# Altium PCB PowerBoard.PcbDoc (part 2 of 2)
Units mm, origin at the board's own origin, x right, y up, seen from the top; angles counter-clockwise.
Board outline 106.25 x 146.25 mm, 4 copper layers (Top Layer, Signal Layer 1, Signal Layer 2, Bottom Layer), stack 2.22 mm thick; 73 components, 20 nets, 353 pads, 2185 vias.
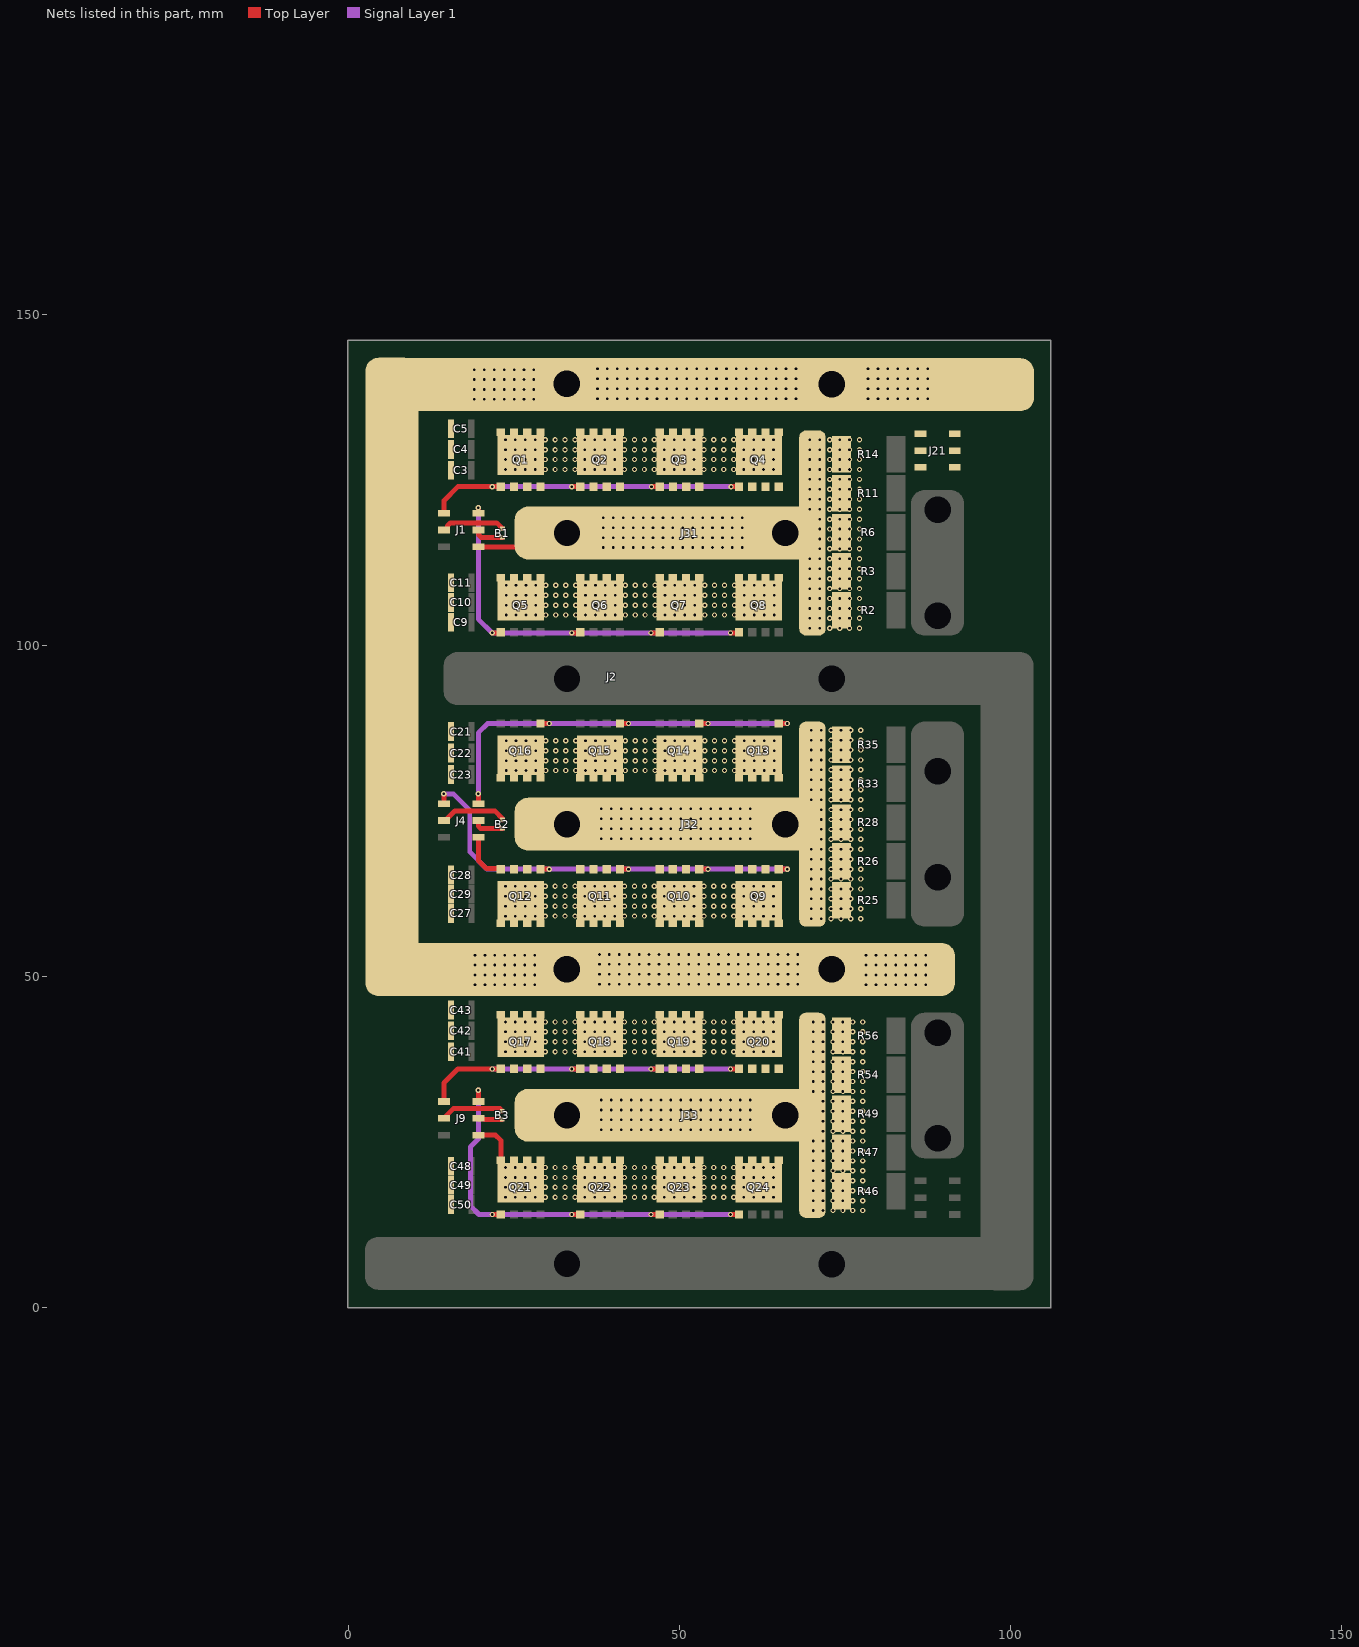
[diagram p4: the nets of this part, all layers, seen from the top]

## Via types
v1: diameter 0.8, hole 0.4, Top Layer to Bottom Layer, tented both sides, 2185 vias

## Nets (pads, with @x,y where several pads share a name; then routed paths per layer and width w, separated by ;. In a path a pad name is that pad's centre, name@x,y a point inside that pad or via, vN(x,y) a via of type N, cw(c..) or ccw(c..) an arc to the next point about the centre after c; other vN are vias at no path point) (continued)
PHASE_U: J1.6 J31.1 Q1.SOURCE Q2.SOURCE Q3.SOURCE Q4.SOURCE Q5.DRAIN Q6.DRAIN Q7.DRAIN Q8.DRAIN R2.2 R3.2 R6.2 R11.2 R14.2 | length 31.5
  Top Layer w0.75: J1.6@19.6,114.92 29.936,114.92 30.793,115.777 32.143,115.777 33,114.92 34.075,115.995 35.425,115.995 36.501,114.92 46,114.92 47.18,116.1 47.7,116.1 J31.1@48.6,117
  other v1: 69.7,102.6 71.2,102.6 72.7,102.6 74.2,102.6 75.7,102.6 77.2,102.6 69.7,104.1 71.2,104.1 72.7,104.1 74.2,104.1 75.7,104.1 77.2,104.1 23.8,104.6 25.3,104.6 26.8,104.6 28.3,104.6 29.8,104.6 31.3,104.6 32.8,104.6 34.3,104.6 35.8,104.6 37.3,104.6 38.8,104.6 40.3,104.6 41.8,104.6 43.3,104.6 44.8,104.6 46.3,104.6 47.8,104.6 49.3,104.6 50.8,104.6 52.3,104.6 53.8,104.6 55.3,104.6 56.8,104.6 58.3,104.6 59.8,104.6 61.3,104.6 62.8,104.6 64.3,104.6 69.7,105.6 71.2,105.6 72.7,105.6 74.2,105.6 75.7,105.6 77.2,105.6 23.8,106.1 25.3,106.1 26.8,106.1 28.3,106.1 29.8,106.1 31.3,106.1 32.8,106.1 34.3,106.1 35.8,106.1 37.3,106.1 38.8,106.1 40.3,106.1 41.8,106.1 43.3,106.1 44.8,106.1 46.3,106.1 47.8,106.1 49.3,106.1 50.8,106.1 52.3,106.1 53.8,106.1 55.3,106.1 56.8,106.1 58.3,106.1 59.8,106.1 61.3,106.1 62.8,106.1 64.3,106.1 69.7,107.1 71.2,107.1 72.7,107.1 74.2,107.1 75.7,107.1 77.2,107.1 23.8,107.6 25.3,107.6 26.8,107.6 28.3,107.6 29.8,107.6 31.3,107.6 32.8,107.6 34.3,107.6 35.8,107.6 37.3,107.6 38.8,107.6 40.3,107.6 41.8,107.6 43.3,107.6 44.8,107.6 46.3,107.6 47.8,107.6 49.3,107.6 50.8,107.6 52.3,107.6 53.8,107.6 55.3,107.6 56.8,107.6 58.3,107.6 59.8,107.6 61.3,107.6 62.8,107.6 64.3,107.6 69.7,108.6 71.2,108.6 72.7,108.6 74.2,108.6 75.7,108.6 77.2,108.6 23.8,109.1 25.3,109.1 26.8,109.1 28.3,109.1 29.8,109.1 31.3,109.1 32.8,109.1 34.3,109.1 35.8,109.1 37.3,109.1 38.8,109.1 40.3,109.1 41.8,109.1 43.3,109.1 44.8,109.1 46.3,109.1 47.8,109.1 49.3,109.1 50.8,109.1 52.3,109.1 53.8,109.1 55.3,109.1 56.8,109.1 58.3,109.1 59.8,109.1 61.3,109.1 62.8,109.1 64.3,109.1 69.7,110.1 71.2,110.1 72.7,110.1 74.2,110.1 75.7,110.1 77.2,110.1 69.7,111.6 71.2,111.6 72.7,111.6 74.2,111.6 75.7,111.6 77.2,111.6 69.7,113.1 71.2,113.1 72.7,113.1 74.2,113.1 75.7,113.1 77.2,113.1 71.2,114.6 72.7,114.6 74.2,114.6 75.7,114.6 77.2,114.6 38.5,114.8 40,114.8 41.5,114.8 43,114.8 44.5,114.8 46,114.8 47.5,114.8 49,114.8 50.5,114.8 52,114.8 53.5,114.8 55,114.8 56.5,114.8 58,114.8 59.5,114.8 71.2,116.1 72.7,116.1 74.2,116.1 75.7,116.1 77.2,116.1 38.5,116.3 40,116.3 41.5,116.3 43,116.3 44.5,116.3 46,116.3 47.5,116.3 49,116.3 50.5,116.3 52,116.3 53.5,116.3 55,116.3 56.5,116.3 58,116.3 59.5,116.3 71.2,117.6 72.7,117.6 74.2,117.6 75.7,117.6 77.2,117.6 38.5,117.8 40,117.8 41.5,117.8 43,117.8 44.5,117.8 46,117.8 47.5,117.8 49,117.8 50.5,117.8 52,117.8 53.5,117.8 55,117.8 56.5,117.8 58,117.8 59.5,117.8 71.2,119.1 72.7,119.1 74.2,119.1 75.7,119.1 77.2,119.1 38.5,119.3 40,119.3 41.5,119.3 43,119.3 44.5,119.3 46,119.3 47.5,119.3 49,119.3 50.5,119.3 52,119.3 53.5,119.3 55,119.3 56.5,119.3 58,119.3 59.5,119.3 69.7,120.6 71.2,120.6 72.7,120.6 74.2,120.6 75.7,120.6 77.2,120.6 69.7,122.1 71.2,122.1 72.7,122.1 74.2,122.1 75.7,122.1 77.2,122.1 69.7,123.6 71.2,123.6 72.7,123.6 74.2,123.6 75.7,123.6 77.2,123.6 69.7,125.1 71.2,125.1 72.7,125.1 74.2,125.1 75.7,125.1 77.2,125.1 69.7,126.6 71.2,126.6 72.7,126.6 74.2,126.6 75.7,126.6 77.2,126.6 69.7,128.1 71.2,128.1 72.7,128.1 74.2,128.1 75.7,128.1 77.2,128.1 69.7,129.6 71.2,129.6 72.7,129.6 74.2,129.6 75.7,129.6 77.2,129.6 69.7,131.1 71.2,131.1 72.7,131.1 74.2,131.1 75.7,131.1 77.2,131.1
PHASE_V: J4.6 J32.1 Q9.SOURCE Q10.SOURCE Q11.SOURCE Q12.SOURCE Q13.DRAIN Q14.DRAIN Q15.DRAIN Q16.DRAIN R25.2 R26.2 R28.2 R33.2 R35.2 | length 7
  Top Layer w0.75: 19.6,70.46 19.6,67.5 20.8,66.3 22.75,66.3 22.9,66.15 Q12.SOURCE@22.9,66
  other v1: 69.9,58.7 71.4,58.7 72.9,58.7 74.4,58.7 75.9,58.7 77.4,58.7 69.9,60.2 71.4,60.2 72.9,60.2 74.4,60.2 75.9,60.2 77.4,60.2 69.9,61.7 71.4,61.7 72.9,61.7 74.4,61.7 75.9,61.7 77.4,61.7 69.9,63.2 71.4,63.2 72.9,63.2 74.4,63.2 75.9,63.2 77.4,63.2 69.9,64.7 71.4,64.7 72.9,64.7 74.4,64.7 75.9,64.7 77.4,64.7 69.9,66.2 71.4,66.2 72.9,66.2 74.4,66.2 75.9,66.2 77.4,66.2 69.9,67.7 71.4,67.7 72.9,67.7 74.4,67.7 75.9,67.7 77.4,67.7 69.9,69.2 71.4,69.2 72.9,69.2 74.4,69.2 75.9,69.2 77.4,69.2 71.4,70.7 72.9,70.7 74.4,70.7 75.9,70.7 77.4,70.7 38.2,70.8 39.7,70.8 41.2,70.8 42.7,70.8 44.2,70.8 45.7,70.8 47.2,70.8 48.7,70.8 50.2,70.8 51.7,70.8 53.2,70.8 54.7,70.8 56.2,70.8 57.7,70.8 59.2,70.8 60.7,70.8 71.4,72.2 72.9,72.2 74.4,72.2 75.9,72.2 77.4,72.2 38.2,72.3 39.7,72.3 41.2,72.3 42.7,72.3 44.2,72.3 45.7,72.3 47.2,72.3 48.7,72.3 50.2,72.3 51.7,72.3 53.2,72.3 54.7,72.3 56.2,72.3 57.7,72.3 59.2,72.3 60.7,72.3 71.4,73.7 72.9,73.7 74.4,73.7 75.9,73.7 77.4,73.7 38.2,73.8 39.7,73.8 41.2,73.8 42.7,73.8 44.2,73.8 45.7,73.8 47.2,73.8 48.7,73.8 50.2,73.8 51.7,73.8 53.2,73.8 54.7,73.8 56.2,73.8 57.7,73.8 59.2,73.8 60.7,73.8 71.4,75.2 72.9,75.2 74.4,75.2 75.9,75.2 77.4,75.2 38.2,75.3 39.7,75.3 41.2,75.3 42.7,75.3 44.2,75.3 45.7,75.3 47.2,75.3 48.7,75.3 50.2,75.3 51.7,75.3 53.2,75.3 54.7,75.3 56.2,75.3 57.7,75.3 59.2,75.3 60.7,75.3 69.9,76.7 71.4,76.7 72.9,76.7 74.4,76.7 75.9,76.7 77.4,76.7 69.9,78.2 71.4,78.2 72.9,78.2 74.4,78.2 75.9,78.2 77.4,78.2 69.9,79.7 71.4,79.7 72.9,79.7 74.4,79.7 75.9,79.7 77.4,79.7 23.8,81.1 25.3,81.1 26.8,81.1 28.3,81.1 29.8,81.1 31.3,81.1 32.8,81.1 34.3,81.1 35.8,81.1 37.3,81.1 38.8,81.1 40.3,81.1 41.8,81.1 43.3,81.1 44.8,81.1 46.3,81.1 47.8,81.1 49.3,81.1 50.8,81.1 52.3,81.1 53.8,81.1 55.3,81.1 56.8,81.1 58.3,81.1 59.8,81.1 61.3,81.1 62.8,81.1 64.3,81.1 69.9,81.2 71.4,81.2 72.9,81.2 74.4,81.2 75.9,81.2 77.4,81.2 23.8,82.6 25.3,82.6 26.8,82.6 28.3,82.6 29.8,82.6 31.3,82.6 32.8,82.6 34.3,82.6 35.8,82.6 37.3,82.6 38.8,82.6 40.3,82.6 41.8,82.6 43.3,82.6 44.8,82.6 46.3,82.6 47.8,82.6 49.3,82.6 50.8,82.6 52.3,82.6 53.8,82.6 55.3,82.6 56.8,82.6 58.3,82.6 59.8,82.6 61.3,82.6 62.8,82.6 64.3,82.6 69.9,82.7 71.4,82.7 72.9,82.7 74.4,82.7 75.9,82.7 77.4,82.7 23.8,84.1 25.3,84.1 26.8,84.1 28.3,84.1 29.8,84.1 31.3,84.1 32.8,84.1 34.3,84.1 35.8,84.1 37.3,84.1 38.8,84.1 40.3,84.1 41.8,84.1 43.3,84.1 44.8,84.1 46.3,84.1 47.8,84.1 49.3,84.1 50.8,84.1 52.3,84.1 53.8,84.1 55.3,84.1 56.8,84.1 58.3,84.1 59.8,84.1 61.3,84.1 62.8,84.1 64.3,84.1 69.9,84.2 71.4,84.2 72.9,84.2 74.4,84.2 75.9,84.2 77.4,84.2 23.8,85.6 25.3,85.6 26.8,85.6 28.3,85.6 29.8,85.6 31.3,85.6 32.8,85.6 34.3,85.6 35.8,85.6 37.3,85.6 38.8,85.6 40.3,85.6 41.8,85.6 43.3,85.6 44.8,85.6 46.3,85.6 47.8,85.6 49.3,85.6 50.8,85.6 52.3,85.6 53.8,85.6 55.3,85.6 56.8,85.6 58.3,85.6 59.8,85.6 61.3,85.6 62.8,85.6 64.3,85.6 69.9,85.7 71.4,85.7 72.9,85.7 74.4,85.7 75.9,85.7 77.4,85.7 69.9,87.2 71.4,87.2 72.9,87.2 74.4,87.2 75.9,87.2 77.4,87.2
PHASE_W: J9.6 J33.1 Q17.SOURCE Q18.SOURCE Q19.SOURCE Q20.SOURCE Q21.DRAIN Q22.DRAIN Q23.DRAIN Q24.DRAIN R46.2 R47.2 R49.2 R54.2 R56.2 | length 6.6
  Top Layer w0.75: J9.6@19.709,26 22.2,26 23,25.2 Q21.DRAIN@23,22.21
  other v1: 70.2,14.6 71.7,14.6 73.2,14.6 74.7,14.6 76.2,14.6 77.7,14.6 70.2,16.1 71.7,16.1 73.2,16.1 74.7,16.1 76.2,16.1 77.7,16.1 23.7,16.6 25.2,16.6 26.7,16.6 28.2,16.6 29.7,16.6 31.2,16.6 32.7,16.6 34.2,16.6 35.7,16.6 37.2,16.6 38.7,16.6 40.2,16.6 41.7,16.6 43.2,16.6 44.7,16.6 46.2,16.6 47.7,16.6 49.2,16.6 50.7,16.6 52.2,16.6 53.7,16.6 55.2,16.6 56.7,16.6 58.2,16.6 59.7,16.6 61.2,16.6 62.7,16.6 64.2,16.6 70.2,17.6 71.7,17.6 73.2,17.6 74.7,17.6 76.2,17.6 77.7,17.6 23.7,18.1 25.2,18.1 26.7,18.1 28.2,18.1 29.7,18.1 31.2,18.1 32.7,18.1 34.2,18.1 35.7,18.1 37.2,18.1 38.7,18.1 40.2,18.1 41.7,18.1 43.2,18.1 44.7,18.1 46.2,18.1 47.7,18.1 49.2,18.1 50.7,18.1 52.2,18.1 53.7,18.1 55.2,18.1 56.7,18.1 58.2,18.1 59.7,18.1 61.2,18.1 62.7,18.1 64.2,18.1 70.2,19.1 71.7,19.1 73.2,19.1 74.7,19.1 76.2,19.1 77.7,19.1 23.7,19.6 25.2,19.6 26.7,19.6 28.2,19.6 29.7,19.6 31.2,19.6 32.7,19.6 34.2,19.6 35.7,19.6 37.2,19.6 38.7,19.6 40.2,19.6 41.7,19.6 43.2,19.6 44.7,19.6 46.2,19.6 47.7,19.6 49.2,19.6 50.7,19.6 52.2,19.6 53.7,19.6 55.2,19.6 56.7,19.6 58.2,19.6 59.7,19.6 61.2,19.6 62.7,19.6 64.2,19.6 70.2,20.6 71.7,20.6 73.2,20.6 74.7,20.6 76.2,20.6 77.7,20.6 23.7,21.1 25.2,21.1 26.7,21.1 28.2,21.1 29.7,21.1 31.2,21.1 32.7,21.1 34.2,21.1 35.7,21.1 37.2,21.1 38.7,21.1 40.2,21.1 41.7,21.1 43.2,21.1 44.7,21.1 46.2,21.1 47.7,21.1 49.2,21.1 50.7,21.1 52.2,21.1 53.7,21.1 55.2,21.1 56.7,21.1 58.2,21.1 59.7,21.1 61.2,21.1 62.7,21.1 64.2,21.1 70.2,22.1 71.7,22.1 73.2,22.1 74.7,22.1 76.2,22.1 77.7,22.1 70.2,23.6 71.7,23.6 73.2,23.6 74.7,23.6 76.2,23.6 77.7,23.6 70.2,25.1 71.7,25.1 73.2,25.1 74.7,25.1 76.2,25.1 77.7,25.1 71.7,26.6 73.2,26.6 74.7,26.6 76.2,26.6 77.7,26.6 38.2,26.8 39.7,26.8 41.2,26.8 42.7,26.8 44.2,26.8 45.7,26.8 47.2,26.8 48.7,26.8 50.2,26.8 51.7,26.8 53.2,26.8 54.7,26.8 56.2,26.8 57.7,26.8 59.2,26.8 60.7,26.8 71.7,28.1 73.2,28.1 74.7,28.1 76.2,28.1 77.7,28.1 38.2,28.3 39.7,28.3 41.2,28.3 42.7,28.3 44.2,28.3 45.7,28.3 47.2,28.3 48.7,28.3 50.2,28.3 51.7,28.3 53.2,28.3 54.7,28.3 56.2,28.3 57.7,28.3 59.2,28.3 60.7,28.3 71.7,29.6 73.2,29.6 74.7,29.6 76.2,29.6 77.7,29.6 38.2,29.8 39.7,29.8 41.2,29.8 42.7,29.8 44.2,29.8 45.7,29.8 47.2,29.8 48.7,29.8 50.2,29.8 51.7,29.8 53.2,29.8 54.7,29.8 56.2,29.8 57.7,29.8 59.2,29.8 60.7,29.8 71.7,31.1 73.2,31.1 74.7,31.1 76.2,31.1 77.7,31.1 38.2,31.3 39.7,31.3 41.2,31.3 42.7,31.3 44.2,31.3 45.7,31.3 47.2,31.3 48.7,31.3 50.2,31.3 51.7,31.3 53.2,31.3 54.7,31.3 56.2,31.3 57.7,31.3 59.2,31.3 60.7,31.3 70.2,32.6 71.7,32.6 73.2,32.6 74.7,32.6 76.2,32.6 77.7,32.6 70.2,34.1 71.7,34.1 73.2,34.1 74.7,34.1 76.2,34.1 77.7,34.1 70.2,35.6 71.7,35.6 73.2,35.6 74.7,35.6 76.2,35.6 77.7,35.6 70.2,37.1 71.7,37.1 73.2,37.1 74.7,37.1 76.2,37.1 77.7,37.1 70.2,38.6 71.7,38.6 73.2,38.6 74.7,38.6 76.2,38.6 77.7,38.6 70.2,40.1 71.7,40.1 73.2,40.1 74.7,40.1 76.2,40.1 77.7,40.1 70.2,41.6 71.7,41.6 73.2,41.6 74.7,41.6 76.2,41.6 77.7,41.6 70.2,43.1 71.7,43.1 73.2,43.1 74.7,43.1 76.2,43.1 77.7,43.1
PWM_U_HIGH: J1.1 Q1.GATE Q2.GATE Q3.GATE Q4.GATE | length 51.2
  Top Layer w0.75: J1.1@14.4,120 14.4,121.9 16.5,124 v1(21.7,124) 21.702,124.002 23.002,124.002 Q1.GATE@23.005,124.005 ; v1(33.733,124) 33.736,124.002 34.998,124.002 Q2.GATE@35,124.005 ; v1(45.767,124) 45.769,124.002 47.005,124.002 Q3.GATE@47.007,124.005 ; v1(57.8,124) 57.802,124.002 58.902,124.002 59.005,123.9 Q4.GATE@59.007,123.902
  Signal Layer 1 w0.75: v1(21.7,124) v1(33.733,124) v1(45.767,124) v1(57.8,124)
PWM_U_LOW: J1.2 Q5.GATE Q6.GATE Q7.GATE Q8.GATE | length 61.8
  Top Layer w0.75: J1.2@19.6,120 v1(19.6,120.8) ; v1(21.7,101.9) 21.71,101.91 22.91,101.91 Q5.GATE@23,102 ; v1(33.7,101.9) 33.71,101.91 34.91,101.91 Q6.GATE@35,102 ; v1(45.7,101.9) 45.71,101.91 46.91,101.91 Q7.GATE@47,102 ; v1(57.7,101.9) 57.71,101.91 58.91,101.91 Q8.GATE@59,102
  Signal Layer 1 w0.75: v1(19.6,120.8) 19.6,103.988 v1@21.626,101.963 ; v1(21.7,101.9) v1(33.7,101.9) v1(45.7,101.9) v1(57.7,101.9)
PWM_V_HIGH: J4.1 Q9.GATE Q10.GATE Q11.GATE Q12.GATE | length 67
  Top Layer w0.75: v1(14.385,77.584) 14.392,77.576 14.392,76.088 J4.1@14.4,76.08 ; Q12.GATE@29,66.21 29.005,66.205 30.295,66.205 v1(30.3,66.2) ; Q11.GATE@41,66.21 41.005,66.205 42.295,66.205 v1(42.3,66.2) ; Q10.GATE@53,66.21 53.005,66.205 54.295,66.205 v1(54.3,66.2) ; Q9.GATE@65,66.21 65.005,66.205 66.295,66.205 v1(66.3,66.2)
  Signal Layer 1 w0.75: v1(14.385,77.584) 15.816,77.584 18.3,75.1 18.3,68.8 20.9,66.2 v1(30.3,66.2) v1(42.3,66.2) v1(54.3,66.2) v1(66.3,66.2)
PWM_V_LOW: J4.2 Q13.GATE Q14.GATE Q15.GATE Q16.GATE | length 63.2
  Top Layer w0.75: J4.2@19.6,76.08 v1(19.599,77.609) ; Q16.GATE@29,88.21 29.005,88.205 30.295,88.205 v1(30.3,88.2) ; Q15.GATE@41,88.21 41.005,88.205 42.295,88.205 v1(42.3,88.2) ; Q14.GATE@53,88.21 53.005,88.205 54.295,88.205 v1(54.3,88.2) ; Q13.GATE@65,88.21 65.005,88.205 66.295,88.205 v1(66.3,88.2)
  Signal Layer 1 w0.75: v1(19.599,77.609) 19.599,86.799 21,88.2 v1(30.3,88.2) v1(42.3,88.2) v1(54.3,88.2) v1(66.3,88.2)
PWM_W_HIGH: J9.1 Q17.GATE Q18.GATE Q19.GATE Q20.GATE | length 51.7
  Top Layer w0.75: J9.1@14.4,31.54 14.4,33.9 16.5,36 v1(21.7,36) Q17.GATE@23,36 ; v1(33.7,36) Q18.GATE@35,36 ; v1(45.7,36) Q19.GATE@47,36 ; v1(57.7,36) Q20.GATE@59,36
  Signal Layer 1 w0.75: v1(21.7,36) v1(33.7,36) v1(45.7,36) v1(57.7,36)
PWM_W_LOW: J9.2 Q21.GATE Q22.GATE Q23.GATE Q24.GATE | length 64.3
  Top Layer w0.75: J9.2@19.6,31.54 v1(19.6,32.8) ; v1(21.7,14) Q21.GATE@23,14 ; v1(33.7,14) Q22.GATE@35,14 ; v1(45.7,14) Q23.GATE@47,14 ; v1(57.7,14) Q24.GATE@59,14
  Signal Layer 1 w0.75: v1(19.6,32.8) 19.6,25.4 18.4,24.2 18.4,15.3 19.7,14 v1(21.7,14) v1(33.7,14) v1(45.7,14) v1(57.7,14)
TEMP_U: B1.2 J1.4 | length 4.1
  Top Layer w0.75: J1.4@19.6,117 19.7,116.9 19.7,116.643 19.993,116.35 B1.2@23.25,116.35
TEMP_U_VDD: B1.1 J1.3 | length 9.9
  Top Layer w0.75: J1.3@14.4,117.46 14.8,117.46 14.925,117.585 14.925,118.061 15.399,118.535 22.365,118.535 B1.1@23.25,117.65
TEMP_V: B2.2 J4.4 | length 4.1
  Top Layer w0.75: 19.6,73 19.6,72.7 19.951,72.349 B2.2@23.288,72.349
TEMP_V_VDD: B2.1 J4.3 | length 9.5
  Top Layer w0.75: J4.3@14.925,73.861 16.064,75 22.086,75 23.25,73.836 B2.1@23.25,73.65
TEMP_W: B3.2 J9.4 | length 3.7
  Top Layer w0.75: J9.4@19.6,28.54 19.725,28.415 20.48,28.415 20.564,28.331 B3.2@23.181,28.331
TEMP_W_VDD: B3.1 J9.3 | length 9
  Top Layer w0.75: J9.3@14.8,29 15.805,30.005 22.845,30.005 B3.1@23.2,29.65
VIN+: C3.2 C4.2 C5.2 C9.1 C10.1 C11.1 C21.2 C22.2 C23.2 C27.1 C28.1 C29.1 C41.2 C42.2 C43.2 C48.1 C49.1 C50.1 J2.1 J21.1 J21.2 J21.3 J21.4 J21.5 J21.6 Q1.DRAIN Q2.DRAIN Q3.DRAIN Q4.DRAIN Q9.DRAIN Q10.DRAIN Q11.DRAIN Q12.DRAIN Q17.DRAIN Q18.DRAIN Q19.DRAIN Q20.DRAIN
  other v1: 23.7,38.6 25.2,38.6 26.7,38.6 28.2,38.6 29.7,38.6 31.2,38.6 32.7,38.6 34.2,38.6 35.7,38.6 37.2,38.6 38.7,38.6 40.2,38.6 41.7,38.6 43.2,38.6 44.7,38.6 46.2,38.6 47.7,38.6 49.2,38.6 50.7,38.6 52.2,38.6 53.7,38.6 55.2,38.6 56.7,38.6 58.2,38.6 59.7,38.6 61.2,38.6 62.7,38.6 64.2,38.6 23.7,40.1 25.2,40.1 26.7,40.1 28.2,40.1 29.7,40.1 31.2,40.1 32.7,40.1 34.2,40.1 35.7,40.1 37.2,40.1 38.7,40.1 40.2,40.1 41.7,40.1 43.2,40.1 44.7,40.1 46.2,40.1 47.7,40.1 49.2,40.1 50.7,40.1 52.2,40.1 53.7,40.1 55.2,40.1 56.7,40.1 58.2,40.1 59.7,40.1 61.2,40.1 62.7,40.1 64.2,40.1 23.7,41.6 25.2,41.6 26.7,41.6 28.2,41.6 29.7,41.6 31.2,41.6 32.7,41.6 34.2,41.6 35.7,41.6 37.2,41.6 38.7,41.6 40.2,41.6 41.7,41.6 43.2,41.6 44.7,41.6 46.2,41.6 47.7,41.6 49.2,41.6 50.7,41.6 52.2,41.6 53.7,41.6 55.2,41.6 56.7,41.6 58.2,41.6 59.7,41.6 61.2,41.6 62.7,41.6 64.2,41.6 23.7,43.1 25.2,43.1 26.7,43.1 28.2,43.1 29.7,43.1 31.2,43.1 32.7,43.1 34.2,43.1 35.7,43.1 37.2,43.1 38.7,43.1 40.2,43.1 41.7,43.1 43.2,43.1 44.7,43.1 46.2,43.1 47.7,43.1 49.2,43.1 50.7,43.1 52.2,43.1 53.7,43.1 55.2,43.1 56.7,43.1 58.2,43.1 59.7,43.1 61.2,43.1 62.7,43.1 64.2,43.1 19.1,48.7 20.6,48.7 22.1,48.7 23.6,48.7 25.1,48.7 26.6,48.7 28.1,48.7 78.2,48.7 79.7,48.7 81.2,48.7 82.7,48.7 84.2,48.7 85.7,48.7 87.2,48.7 37.9,48.8 39.4,48.8 40.9,48.8 42.4,48.8 43.9,48.8 45.4,48.8 46.9,48.8 48.4,48.8 49.9,48.8 51.4,48.8 52.9,48.8 54.4,48.8 55.9,48.8 57.4,48.8 58.9,48.8 60.4,48.8 61.9,48.8 63.4,48.8 64.9,48.8 66.4,48.8 67.9,48.8 19.1,50.2 20.6,50.2 22.1,50.2 23.6,50.2 25.1,50.2 26.6,50.2 28.1,50.2 78.2,50.2 79.7,50.2 81.2,50.2 82.7,50.2 84.2,50.2 85.7,50.2 87.2,50.2 37.9,50.3 39.4,50.3 40.9,50.3 42.4,50.3 43.9,50.3 45.4,50.3 46.9,50.3 48.4,50.3 49.9,50.3 51.4,50.3 52.9,50.3 54.4,50.3 55.9,50.3 57.4,50.3 58.9,50.3 60.4,50.3 61.9,50.3 63.4,50.3 64.9,50.3 66.4,50.3 67.9,50.3 19.1,51.7 20.6,51.7 22.1,51.7 23.6,51.7 25.1,51.7 26.6,51.7 28.1,51.7 78.2,51.7 79.7,51.7 81.2,51.7 82.7,51.7 84.2,51.7 85.7,51.7 87.2,51.7 37.9,51.8 39.4,51.8 40.9,51.8 42.4,51.8 43.9,51.8 45.4,51.8 46.9,51.8 48.4,51.8 49.9,51.8 51.4,51.8 52.9,51.8 54.4,51.8 55.9,51.8 57.4,51.8 58.9,51.8 60.4,51.8 61.9,51.8 63.4,51.8 64.9,51.8 66.4,51.8 67.9,51.8 19.1,53.2 20.6,53.2 22.1,53.2 23.6,53.2 25.1,53.2 26.6,53.2 28.1,53.2 78.2,53.2 79.7,53.2 81.2,53.2 82.7,53.2 84.2,53.2 85.7,53.2 87.2,53.2 37.9,53.3 39.4,53.3 40.9,53.3 42.4,53.3 43.9,53.3 45.4,53.3 46.9,53.3 48.4,53.3 49.9,53.3 51.4,53.3 52.9,53.3 54.4,53.3 55.9,53.3 57.4,53.3 58.9,53.3 60.4,53.3 61.9,53.3 63.4,53.3 64.9,53.3 66.4,53.3 67.9,53.3 23.7,59.1 25.2,59.1 26.7,59.1 28.2,59.1 29.7,59.1 31.2,59.1 32.7,59.1 34.2,59.1 35.7,59.1 37.2,59.1 38.7,59.1 40.2,59.1 41.7,59.1 43.2,59.1 44.7,59.1 46.2,59.1 47.7,59.1 49.2,59.1 50.7,59.1 52.2,59.1 53.7,59.1 55.2,59.1 56.7,59.1 58.2,59.1 59.7,59.1 61.2,59.1 62.7,59.1 64.2,59.1 23.7,60.6 25.2,60.6 26.7,60.6 28.2,60.6 29.7,60.6 31.2,60.6 32.7,60.6 34.2,60.6 35.7,60.6 37.2,60.6 38.7,60.6 40.2,60.6 41.7,60.6 43.2,60.6 44.7,60.6 46.2,60.6 47.7,60.6 49.2,60.6 50.7,60.6 52.2,60.6 53.7,60.6 55.2,60.6 56.7,60.6 58.2,60.6 59.7,60.6 61.2,60.6 62.7,60.6 64.2,60.6 23.7,62.1 25.2,62.1 26.7,62.1 28.2,62.1 29.7,62.1 31.2,62.1 32.7,62.1 34.2,62.1 35.7,62.1 37.2,62.1 38.7,62.1 40.2,62.1 41.7,62.1 43.2,62.1 44.7,62.1 46.2,62.1 47.7,62.1 49.2,62.1 50.7,62.1 52.2,62.1 53.7,62.1 55.2,62.1 56.7,62.1 58.2,62.1 59.7,62.1 61.2,62.1 62.7,62.1 64.2,62.1 23.7,63.6 25.2,63.6 26.7,63.6 28.2,63.6 29.7,63.6 31.2,63.6 32.7,63.6 34.2,63.6 35.7,63.6 37.2,63.6 38.7,63.6 40.2,63.6 41.7,63.6 43.2,63.6 44.7,63.6 46.2,63.6 47.7,63.6 49.2,63.6 50.7,63.6 52.2,63.6 53.7,63.6 55.2,63.6 56.7,63.6 58.2,63.6 59.7,63.6 61.2,63.6 62.7,63.6 64.2,63.6 23.7,126.6 25.2,126.6 26.7,126.6 28.2,126.6 29.7,126.6 31.2,126.6 32.7,126.6 34.2,126.6 35.7,126.6 37.2,126.6 38.7,126.6 40.2,126.6 41.7,126.6 43.2,126.6 44.7,126.6 46.2,126.6 47.7,126.6 49.2,126.6 50.7,126.6 52.2,126.6 53.7,126.6 55.2,126.6 56.7,126.6 58.2,126.6 59.7,126.6 61.2,126.6 62.7,126.6 64.2,126.6 23.7,128.1 25.2,128.1 26.7,128.1 28.2,128.1 29.7,128.1 31.2,128.1 32.7,128.1 34.2,128.1 35.7,128.1 37.2,128.1 38.7,128.1 40.2,128.1 41.7,128.1 43.2,128.1 44.7,128.1 46.2,128.1 47.7,128.1 49.2,128.1 50.7,128.1 52.2,128.1 53.7,128.1 55.2,128.1 56.7,128.1 58.2,128.1 59.7,128.1 61.2,128.1 62.7,128.1 64.2,128.1 23.7,129.6 25.2,129.6 26.7,129.6 28.2,129.6 29.7,129.6 31.2,129.6 32.7,129.6 34.2,129.6 35.7,129.6 37.2,129.6 38.7,129.6 40.2,129.6 41.7,129.6 43.2,129.6 44.7,129.6 46.2,129.6 47.7,129.6 49.2,129.6 50.7,129.6 52.2,129.6 53.7,129.6 55.2,129.6 56.7,129.6 58.2,129.6 59.7,129.6 61.2,129.6 62.7,129.6 64.2,129.6 23.7,131.1 25.2,131.1 26.7,131.1 28.2,131.1 29.7,131.1 31.2,131.1 32.7,131.1 34.2,131.1 35.7,131.1 37.2,131.1 38.7,131.1 40.2,131.1 41.7,131.1 43.2,131.1 44.7,131.1 46.2,131.1 47.7,131.1 49.2,131.1 50.7,131.1 52.2,131.1 53.7,131.1 55.2,131.1 56.7,131.1 58.2,131.1 59.7,131.1 61.2,131.1 62.7,131.1 64.2,131.1 19,137.2 20.5,137.2 22,137.2 23.5,137.2 25,137.2 26.5,137.2 28,137.2 37.6,137.3 39.1,137.3 40.6,137.3 42.1,137.3 43.6,137.3 45.1,137.3 46.6,137.3 48.1,137.3 49.6,137.3 51.1,137.3 52.6,137.3 54.1,137.3 55.6,137.3 57.1,137.3 58.6,137.3 60.1,137.3 61.6,137.3 63.1,137.3 64.6,137.3 66.1,137.3 67.6,137.3 78.5,137.3 80,137.3 81.5,137.3 83,137.3 84.5,137.3 86,137.3 87.5,137.3 19,138.7 20.5,138.7 22,138.7 23.5,138.7 25,138.7 26.5,138.7 28,138.7 37.6,138.8 39.1,138.8 40.6,138.8 42.1,138.8 43.6,138.8 45.1,138.8 46.6,138.8 48.1,138.8 49.6,138.8 51.1,138.8 52.6,138.8 54.1,138.8 55.6,138.8 57.1,138.8 58.6,138.8 60.1,138.8 61.6,138.8 63.1,138.8 64.6,138.8 66.1,138.8 67.6,138.8 78.5,138.8 80,138.8 81.5,138.8 83,138.8 84.5,138.8 86,138.8 87.5,138.8 19,140.2 20.5,140.2 22,140.2 23.5,140.2 25,140.2 26.5,140.2 28,140.2 37.6,140.3 39.1,140.3 40.6,140.3 42.1,140.3 43.6,140.3 45.1,140.3 46.6,140.3 48.1,140.3 49.6,140.3 51.1,140.3 52.6,140.3 54.1,140.3 55.6,140.3 57.1,140.3 58.6,140.3 60.1,140.3 61.6,140.3 63.1,140.3 64.6,140.3 66.1,140.3 67.6,140.3 78.5,140.3 80,140.3 81.5,140.3 83,140.3 84.5,140.3 86,140.3 87.5,140.3 19,141.7 20.5,141.7 22,141.7 23.5,141.7 25,141.7 26.5,141.7 28,141.7 37.6,141.8 39.1,141.8 40.6,141.8 42.1,141.8 43.6,141.8 45.1,141.8 46.6,141.8 48.1,141.8 49.6,141.8 51.1,141.8 52.6,141.8 54.1,141.8 55.6,141.8 57.1,141.8 58.6,141.8 60.1,141.8 61.6,141.8 63.1,141.8 64.6,141.8 66.1,141.8 67.6,141.8 78.5,141.8 80,141.8 81.5,141.8 83,141.8 84.5,141.8 86,141.8 87.5,141.8

## Polygon pours and split planes (outlines as drawn)
GND on Top Layer "GND_L01_P061" (solid, remove dead copper, pour order 61): 0,146 0,0 106,0 106,146
OUT_U on Top Layer "OUT_U_L01_P000" (solid, remove dead copper, pour order 0): 79,132.5 79,101.5 105.9,101.5 106,101.6 106,123.5 85.9,123.5 84.5,124.9 84.5,132.5
PHASE_U on Top Layer "PHASE_U_L01_P001" (solid, remove dead copper, pour order 1): 22,114.173 22.66,114.833 23.633,114.833 24.6,115.8 24.577,115.823 24.577,123.123 24.3,123.4 24.3,124.7 32,124.7 32,121.5 32.007,121.493 36.293,121.493 36.3,121.5 36.3,124.7 44,124.7 44,121.5 48.3,121.5 48.3,124.7 56,124.7 56,121.5 60.3,121.5 60.3,124.7 66.1,124.7 67.2,125.8 67.2,132.5 79,132.5 79,101.5 68.5,101.5 66.211,103.789 22.011,103.789 22,103.8
PHASE_W on Top Layer "PHASE_W_L01_P002" (solid, remove dead copper, pour order 2): 21.95,26.173 22.61,26.833 23.583,26.833 24.55,27.8 24.527,27.823 24.527,35.123 24.25,35.4 24.25,36.7 31.95,36.7 31.95,33.5 31.957,33.493 36.243,33.493 36.25,33.5 36.25,36.7 43.95,36.7 43.95,33.5 48.25,33.5 48.25,36.7 55.95,36.7 55.95,33.5 60.25,33.5 60.25,36.7 66.05,36.7 67.15,37.8 67.15,44.5 78.95,44.5 78.95,13.5 68.45,13.5 66.161,15.789 21.961,15.789 21.95,15.8
OUT_V on Top Layer "OUT_V_L01_P003" (solid, remove dead copper, pour order 3): 79,88.5 79,57.5 93.5,57.5 93.5,88.5
PHASE_V on Top Layer "PHASE_V_L01_P004" (solid, remove dead copper, pour order 4): 79,88.5 68.5,88.5 66.5,86.5 22,86.5 22,79 24.5,76.5 24.463,76.463 24.463,71.463 23.954,70.954 19.246,70.954 19.2,71 19.2,67.4 21.1,65.5 27.6,65.5 27.6,68 32,68 32,65.5 39.7,65.5 39.7,68 44,68 44,65.5 51.6,65.5 51.6,68 56,68 56,65.5 63.6,65.5 63.6,68 66.7,68 68,66.7 68,58.2 68.7,57.5 79,57.5
VIN+ on Top Layer "VIN+_L01_P005" (solid, remove dead copper, pour order 5): 85.5,132.5 85.5,125.5 86.5,124.5 105.361,124.5 105.361,146.061 105.3,146 0,146 0,14.1 0.1,14 16.15,14 16.172,13.978 16.2,14.006 16.2,22.5 12.534,22.5 12.5,22.534 12.5,36.9 12.5,37 16.5,37 16.5,46.9 22,46.9 22,37.8 65.6,37.8 66.2,38.4 66.2,45.4 66.1,45.5 93.5,45.5 93.5,56 66.5,56 66.5,64.422 66.472,64.45 66.423,64.4 22,64.4 22,57.5 16.5,57.5 16.5,67 12.5,67 12.5,79 16.5,79 16.5,88.5 12,88.5 12,102 16.5,102 16.5,111 12,111 12,125 16.5,125 16.5,134.5 22,134.5 22,125.8 65.8,125.8 66.3,126.3 66.3,133.5 85.5,133.5 85.5,125.5 86.5,124.5 86.4,124.5 85.5,125.4
OUT_W on Top Layer "OUT_W_L01_P006" (solid, remove dead copper, pour order 6): 79.5,44.5 93.5,44.5 93.5,22.5 86.1,22.5 84.2,20.6 84.2,13.5 79.5,13.5
VIN+ on Signal Layer 1 "VIN+_L02_P020" (solid, remove dead copper, pour order 20): 85.5,132.5 85.5,125.5 86.5,124.5 105.361,124.5 105.361,146.061 105.3,146 0,146 0,14.1 0.1,14 16.15,14 16.172,13.978 16.2,14.006 16.2,22.5 12.534,22.5 12.5,22.534 12.5,36.9 12.5,37 16.5,37 16.5,45 22,45 22,37.8 65.6,37.8 66.2,38.4 66.2,45.4 66.1,45.5 93.5,45.5 93.5,56 66.5,56 66.5,64.422 66.472,64.45 66.423,64.4 22,64.4 22,57.5 16.5,57.5 16.5,67 12.5,67 12.5,79 16.5,79 16.5,88.5 12,88.5 12,102 16.5,102 16.5,111 12,111 12,125 16.5,125 16.5,134.5 22,134.5 22,125.8 65.8,125.8 66.3,126.3 66.3,133.5 85.5,133.5 85.5,125.5 86.5,124.5 86.4,124.5 85.5,125.4
GND on Signal Layer 1 "GND_L02_P065" (solid, remove dead copper, pour order 65): 0,146 0,0 106,0 106,146
OUT_W on Signal Layer 1 "OUT_W_L02_P058" (solid, remove dead copper, pour order 58): 79.5,44.5 93.5,44.5 93.5,22.5 86.1,22.5 84.2,20.6 84.2,13.5 79.5,13.5
OUT_V on Signal Layer 1 "OUT_V_L02_P052" (solid, remove dead copper, pour order 52): 79,88.5 79,57.5 93.5,57.5 93.5,88.5
OUT_U on Signal Layer 1 "OUT_U_L02_P046" (solid, remove dead copper, pour order 46): 79,132.5 79,101.5 105.9,101.5 106,101.6 106,123.5 85.9,123.5 84.5,124.9 84.5,132.5
PHASE_W on Signal Layer 1 "PHASE_W_L02_P040" (solid, remove dead copper, pour order 40): 21.95,26.173 22.61,26.833 23.583,26.833 24.55,27.8 24.527,27.823 24.527,35.123 24.25,35.4 24.25,36.7 31.95,36.7 31.95,33.5 31.957,33.493 36.243,33.493 36.25,33.5 36.25,36.7 43.95,36.7 43.95,33.5 48.25,33.5 48.25,36.7 55.95,36.7 55.95,33.5 60.25,33.5 60.25,36.7 66.05,36.7 67.15,37.8 67.15,44.5 78.95,44.5 78.95,13.5 68.45,13.5 66.161,15.789 21.961,15.789 21.95,15.8
PHASE_V on Signal Layer 1 "PHASE_V_L02_P034" (solid, remove dead copper, pour order 34): 78.551,88.5 68.5,88.5 66.5,86.5 22,86.5 22,79 24.5,76.5 24.463,76.463 24.463,71.463 23.954,70.954 19.246,70.954 19.2,71 19.2,67.4 21.1,65.5 27.6,65.5 27.6,68 32,68 32,65.5 39.7,65.5 39.7,68 44,68 44,65.5 51.6,65.5 51.6,68 56,68 56,65.5 63.6,65.5 63.6,68 66.7,68 68,66.7 68,58.2 68.7,57.5 78.551,57.5
PHASE_U on Signal Layer 1 "PHASE_U_L02_P028" (solid, remove dead copper, pour order 28): 22,114.173 22.66,114.833 23.633,114.833 24.6,115.8 24.577,115.823 24.577,123.123 24.3,123.4 24.3,124.7 32,124.7 32,121.5 32.007,121.493 36.293,121.493 36.3,121.5 36.3,124.7 44,124.7 44,121.5 48.3,121.5 48.3,124.7 56,124.7 56,121.5 60.3,121.5 60.3,124.7 66.1,124.7 67.2,125.8 67.2,132.5 78.5,132.5 78.5,101.5 68.5,101.5 66.211,103.789 22.011,103.789 22,103.8
GND on Bottom Layer "GND_L04_P067" (solid, remove dead copper, pour order 67): 0.1,146.2 0.1,0.2 106.1,0.2 106.1,146.2
OUT_W on Bottom Layer "OUT_W_L04_P060" (solid, remove dead copper, pour order 60): 79.5,44.5 93.5,44.5 93.5,22.5 86.1,22.5 84.2,20.6 84.2,13.5 79.5,13.5
OUT_V on Bottom Layer "OUT_V_L04_P054" (solid, remove dead copper, pour order 54): 79.01,88.5 79.01,57.5 93.51,57.5 93.51,88.5
OUT_U on Bottom Layer "OUT_U_L04_P048" (solid, remove dead copper, pour order 48): 79,132.5 79,101.5 105.9,101.5 106,101.6 106,123.5 85.9,123.5 84.5,124.9 84.5,132.5
PHASE_W on Bottom Layer "PHASE_W_L04_P042" (solid, remove dead copper, pour order 42): 21.95,26.173 22.61,26.833 23.583,26.833 24.55,27.8 24.527,27.823 24.527,35.123 24.25,35.4 24.25,36.7 31.95,36.7 31.95,33.5 31.957,33.493 36.243,33.493 36.25,33.5 36.25,36.7 43.95,36.7 43.95,33.5 48.25,33.5 48.25,36.7 55.95,36.7 55.95,33.5 60.25,33.5 60.25,36.7 66.05,36.7 67.15,37.8 67.15,44.5 78.95,44.5 78.95,13.5 68.45,13.5 66.161,15.789 21.961,15.789 21.95,15.8
PHASE_V on Bottom Layer "PHASE_V_L04_P036" (solid, remove dead copper, pour order 36): 78.517,88.5 68.5,88.5 66.5,86.5 22,86.5 22,79 24.5,76.5 24.463,76.463 24.463,71.463 23.954,70.954 19.246,70.954 19.2,71 19.2,67.4 21.1,65.5 27.6,65.5 27.6,68 32,68 32,65.5 39.7,65.5 39.7,68 44,68 44,65.5 51.6,65.5 51.6,68 56,68 56,65.5 63.6,65.5 63.6,68 66.7,68 68,66.7 68,58.2 68.7,57.5 78.517,57.5
PHASE_U on Bottom Layer "PHASE_U_L04_P027" (solid, remove dead copper, pour order 27): 22,114.173 22.66,114.833 23.633,114.833 24.6,115.8 24.577,115.823 24.577,123.123 24.3,123.4 24.3,124.7 32,124.7 32,121.5 32.007,121.493 36.293,121.493 36.3,121.5 36.3,124.7 44,124.7 44,121.5 48.3,121.5 48.3,124.7 56,124.7 56,121.5 60.3,121.5 60.3,124.7 66.1,124.7 67.2,125.8 67.2,132.5 78.5,132.5 78.5,101.5 68.5,101.5 66.211,103.789 22.011,103.789 22,103.8
VIN+ on Bottom Layer "VIN+_L04_P018" (solid, remove dead copper, pour order 18): 85.6,132.7 85.6,125.7 86.6,124.7 105.461,124.7 105.461,146.261 105.4,146.2 0.1,146.2 0.1,14.3 0.2,14.2 16.25,14.2 16.272,14.178 16.3,14.206 16.3,22.7 12.634,22.7 12.6,22.734 12.6,37.1 12.6,37.2 16.6,37.2 16.6,45.2 22.1,45.2 22.1,38 65.7,38 66.3,38.6 66.3,45.6 66.2,45.7 93.6,45.7 93.6,56.2 66.6,56.2 66.6,64.622 66.572,64.65 66.523,64.6 22.1,64.6 22.1,57.7 16.6,57.7 16.6,67.2 12.6,67.2 12.6,79.2 16.6,79.2 16.6,88.7 12.1,88.7 12.1,102.2 16.6,102.2 16.6,111.2 12.1,111.2 12.1,125.2 16.6,125.2 16.6,134.5 22.1,134.5 22.1,126 65.9,126 66.4,126.5 66.4,133.7 85.6,133.7 85.6,125.7 86.6,124.7 86.5,124.7 85.6,125.6
VIN+ on Signal Layer 2 "VIN+_L03_P021" (solid, remove dead copper, pour order 21): 85.5,132.5 85.5,125.5 86.5,124.5 105.361,124.5 105.361,146.061 105.3,146 0,146 0,14.1 0.1,14 16.15,14 16.172,13.978 16.2,14.006 16.2,22.5 12.534,22.5 12.5,22.534 12.5,36.9 12.5,37 16.5,37 16.5,45 22,45 22,37.8 65.6,37.8 66.2,38.4 66.2,45.4 66.1,45.5 93.5,45.5 93.5,56 66.5,56 66.5,64.422 66.472,64.45 66.423,64.4 22,64.4 22,57.5 16.5,57.5 16.5,67 12.5,67 12.5,79 16.5,79 16.5,88.5 12,88.5 12,102 16.5,102 16.5,111 12,111 12,125 16.5,125 16.5,134.5 22,134.5 22,125.8 65.8,125.8 66.3,126.3 66.3,133.5 85.5,133.5 85.5,125.5 86.5,124.5 86.4,124.5 85.5,125.4
GND on Signal Layer 2 "GND_L03_P066" (solid, remove dead copper, pour order 66): 0,146 0,0 106,0 106,146
OUT_W on Signal Layer 2 "OUT_W_L03_P059" (solid, remove dead copper, pour order 59): 79.5,44.5 93.5,44.5 93.5,22.5 86.1,22.5 84.2,20.6 84.2,13.5 79.5,13.5
OUT_V on Signal Layer 2 "OUT_V_L03_P053" (solid, remove dead copper, pour order 53): 79,88.5 79,57.5 93.5,57.5 93.5,88.5
OUT_U on Signal Layer 2 "OUT_U_L03_P047" (solid, remove dead copper, pour order 47): 79,132.5 79,101.5 105.9,101.5 106,101.6 106,123.5 85.9,123.5 84.5,124.9 84.5,132.5
PHASE_W on Signal Layer 2 "PHASE_W_L03_P041" (solid, remove dead copper, pour order 41): 21.95,26.173 22.61,26.833 23.583,26.833 24.55,27.8 24.527,27.823 24.527,35.123 24.25,35.4 24.25,36.7 31.95,36.7 31.95,33.5 31.957,33.493 36.243,33.493 36.25,33.5 36.25,36.7 43.95,36.7 43.95,33.5 48.25,33.5 48.25,36.7 55.95,36.7 55.95,33.5 60.25,33.5 60.25,36.7 66.05,36.7 67.15,37.8 67.15,44.5 78.95,44.5 78.95,13.5 68.45,13.5 66.161,15.789 21.961,15.789 21.95,15.8
PHASE_V on Signal Layer 2 "PHASE_V_L03_P035" (solid, remove dead copper, pour order 35): 78.5,88.5 68.5,88.5 66.5,86.5 22,86.5 22,79 24.5,76.5 24.463,76.463 24.463,71.463 23.954,70.954 19.246,70.954 19.2,71 19.2,67.4 21.1,65.5 27.6,65.5 27.6,68 32,68 32,65.5 39.7,65.5 39.7,68 44,68 44,65.5 51.6,65.5 51.6,68 56,68 56,65.5 63.6,65.5 63.6,68 66.7,68 68,66.7 68,58.2 68.7,57.5 78.5,57.5
PHASE_U on Signal Layer 2 "PHASE_U_L03_P030" (solid, remove dead copper, pour order 30): 22,114.173 22.66,114.833 23.633,114.833 24.6,115.8 24.577,115.823 24.577,123.123 24.3,123.4 24.3,124.7 32,124.7 32,121.5 32.007,121.493 36.293,121.493 36.3,121.5 36.3,124.7 44,124.7 44,121.5 48.3,121.5 48.3,124.7 56,124.7 56,121.5 60.3,121.5 60.3,124.7 66.1,124.7 67.2,125.8 67.2,132.5 78.54,132.5 78.54,101.5 68.5,101.5 66.211,103.789 22.011,103.789 22,103.8

## Keep-outs
Keep-Out Layer:
  lines w0.254: 0,0 106,0 106,146 0,146 0,0

## Dimensions
-4.5,51 to 14.4,71 on Top Paste
14.4,26 to 0,0 on Top Paste
14.4,120 to 0,146 on Top Paste
17,145.5 to 0,146 on Top Paste
91.6,14 to 106,0 on Top Paste
106,146 to 91.6,132 on Top Paste
66,73 to 66,29 on Top Paste
66,73 to 106,146 on Top Paste
34,31.539 to 0,0 on Top Paste
33,117 to 0,146 on Top Paste
0,146 to 0,0 on Top Paste
20.5,22 to 0,0 on Top Paste
0,146 to 22,135.5 on Top Paste

## Text inside footprints (layer, text, board x,y; h text height)
J6: Top Assembly "1" at 76.998,14.389 h1.52
J31: Top Assembly "1" at 33.298,58.789 h1.52; Top Assembly "1" at 37.172,83.3 h1.52
J32: Top Assembly "1" at 33.298,14.789 h1.52; Top Assembly "1" at 37.172,39.3 h1.52